# Altium PCB PCB1.PcbDoc
Units mil, origin at the board's own origin, x right, y up, seen from the top; angles counter-clockwise.
Board outline 3620 x 3695 mil, 2 copper layers (Top Layer, Bottom Layer); 45 components, 43 nets, 180 pads, 1 vias.
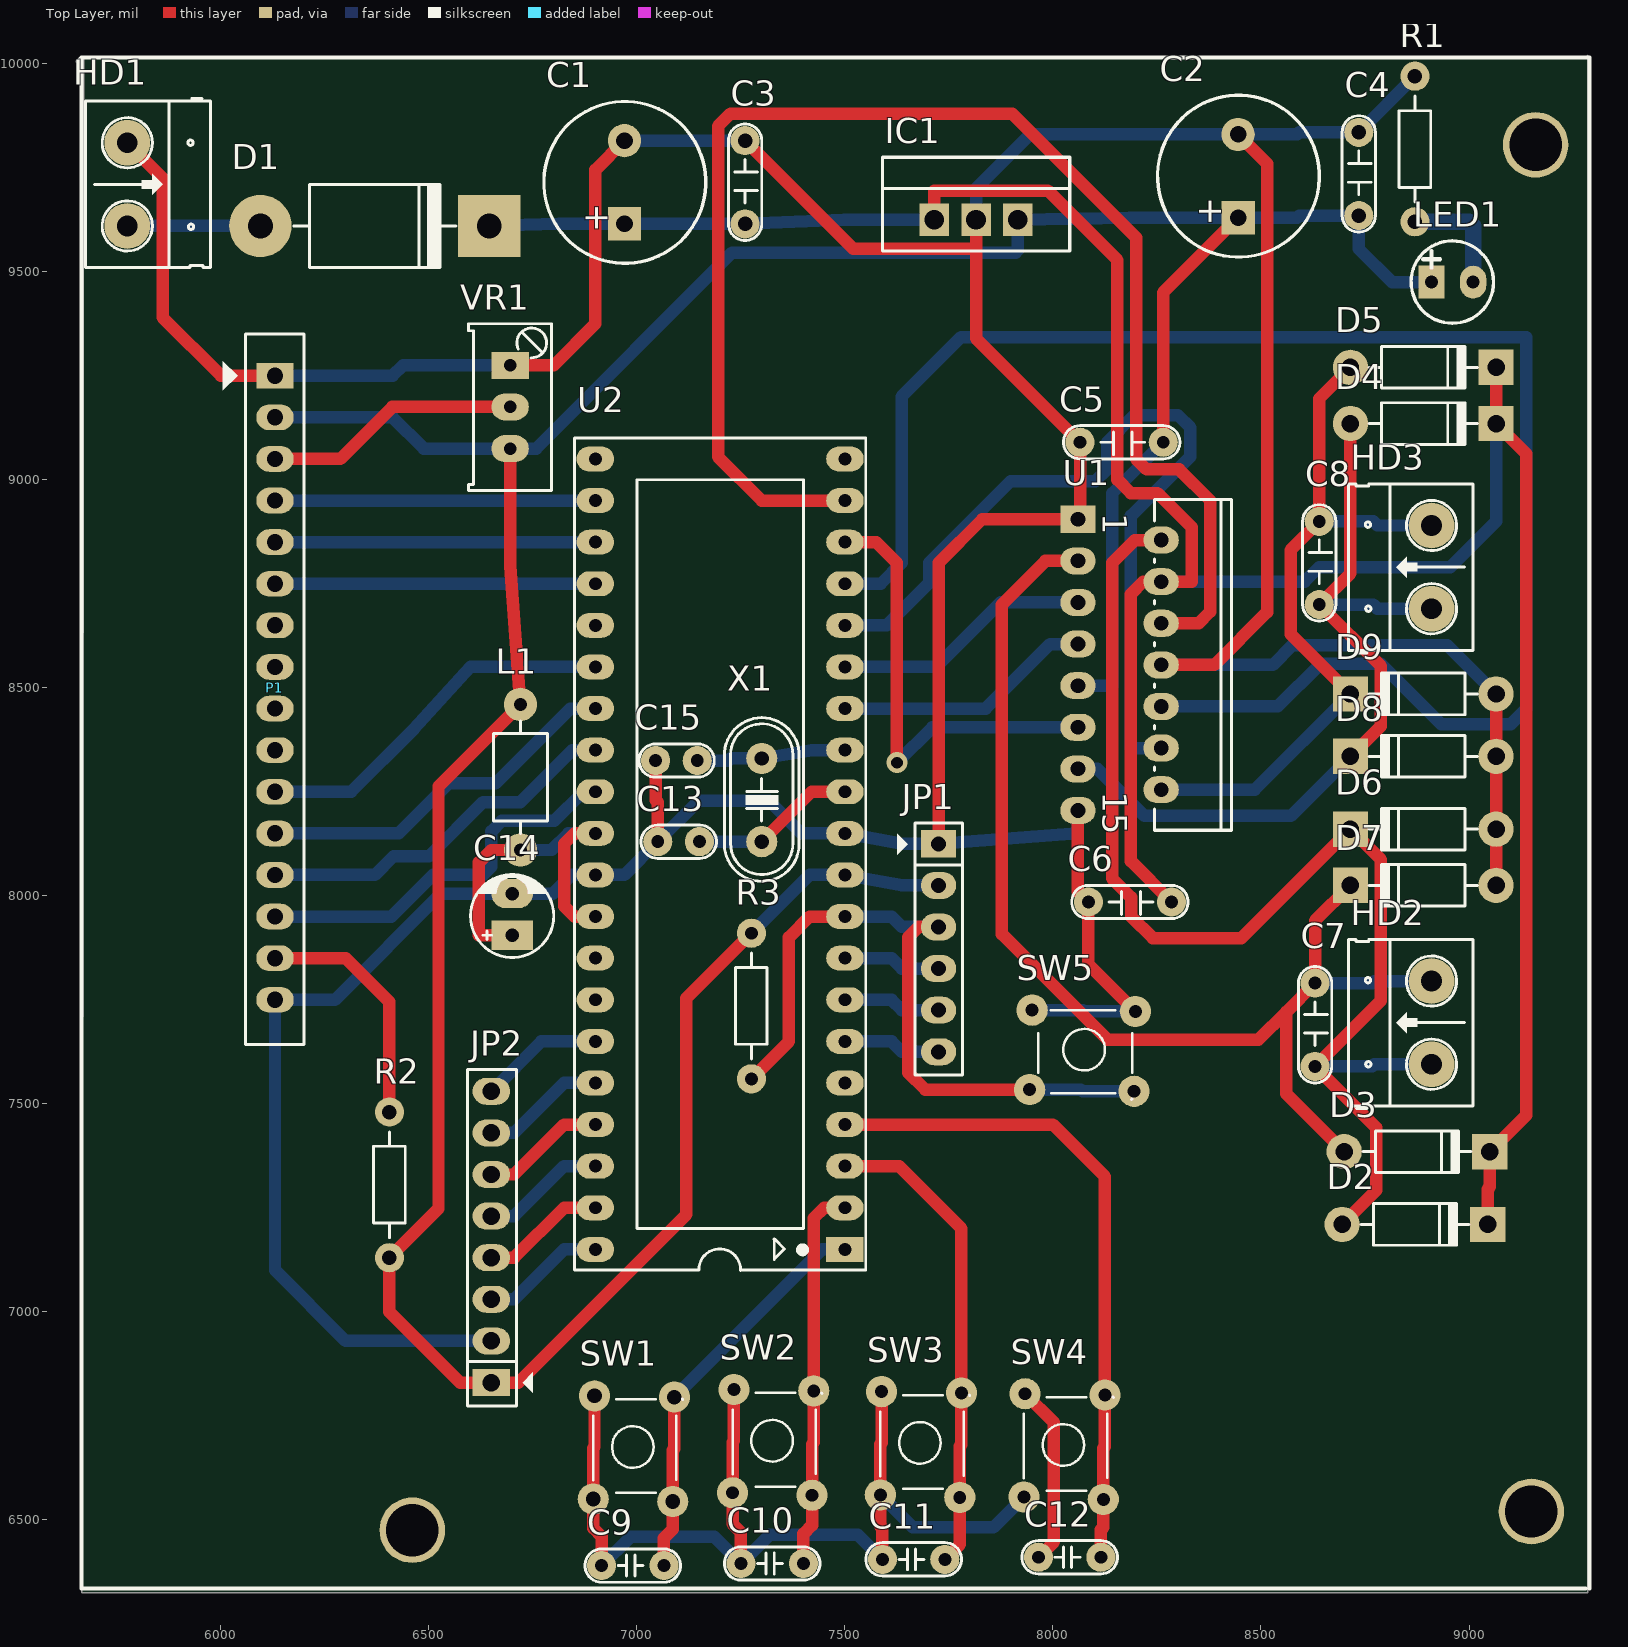
[diagram p0: Top Layer view]
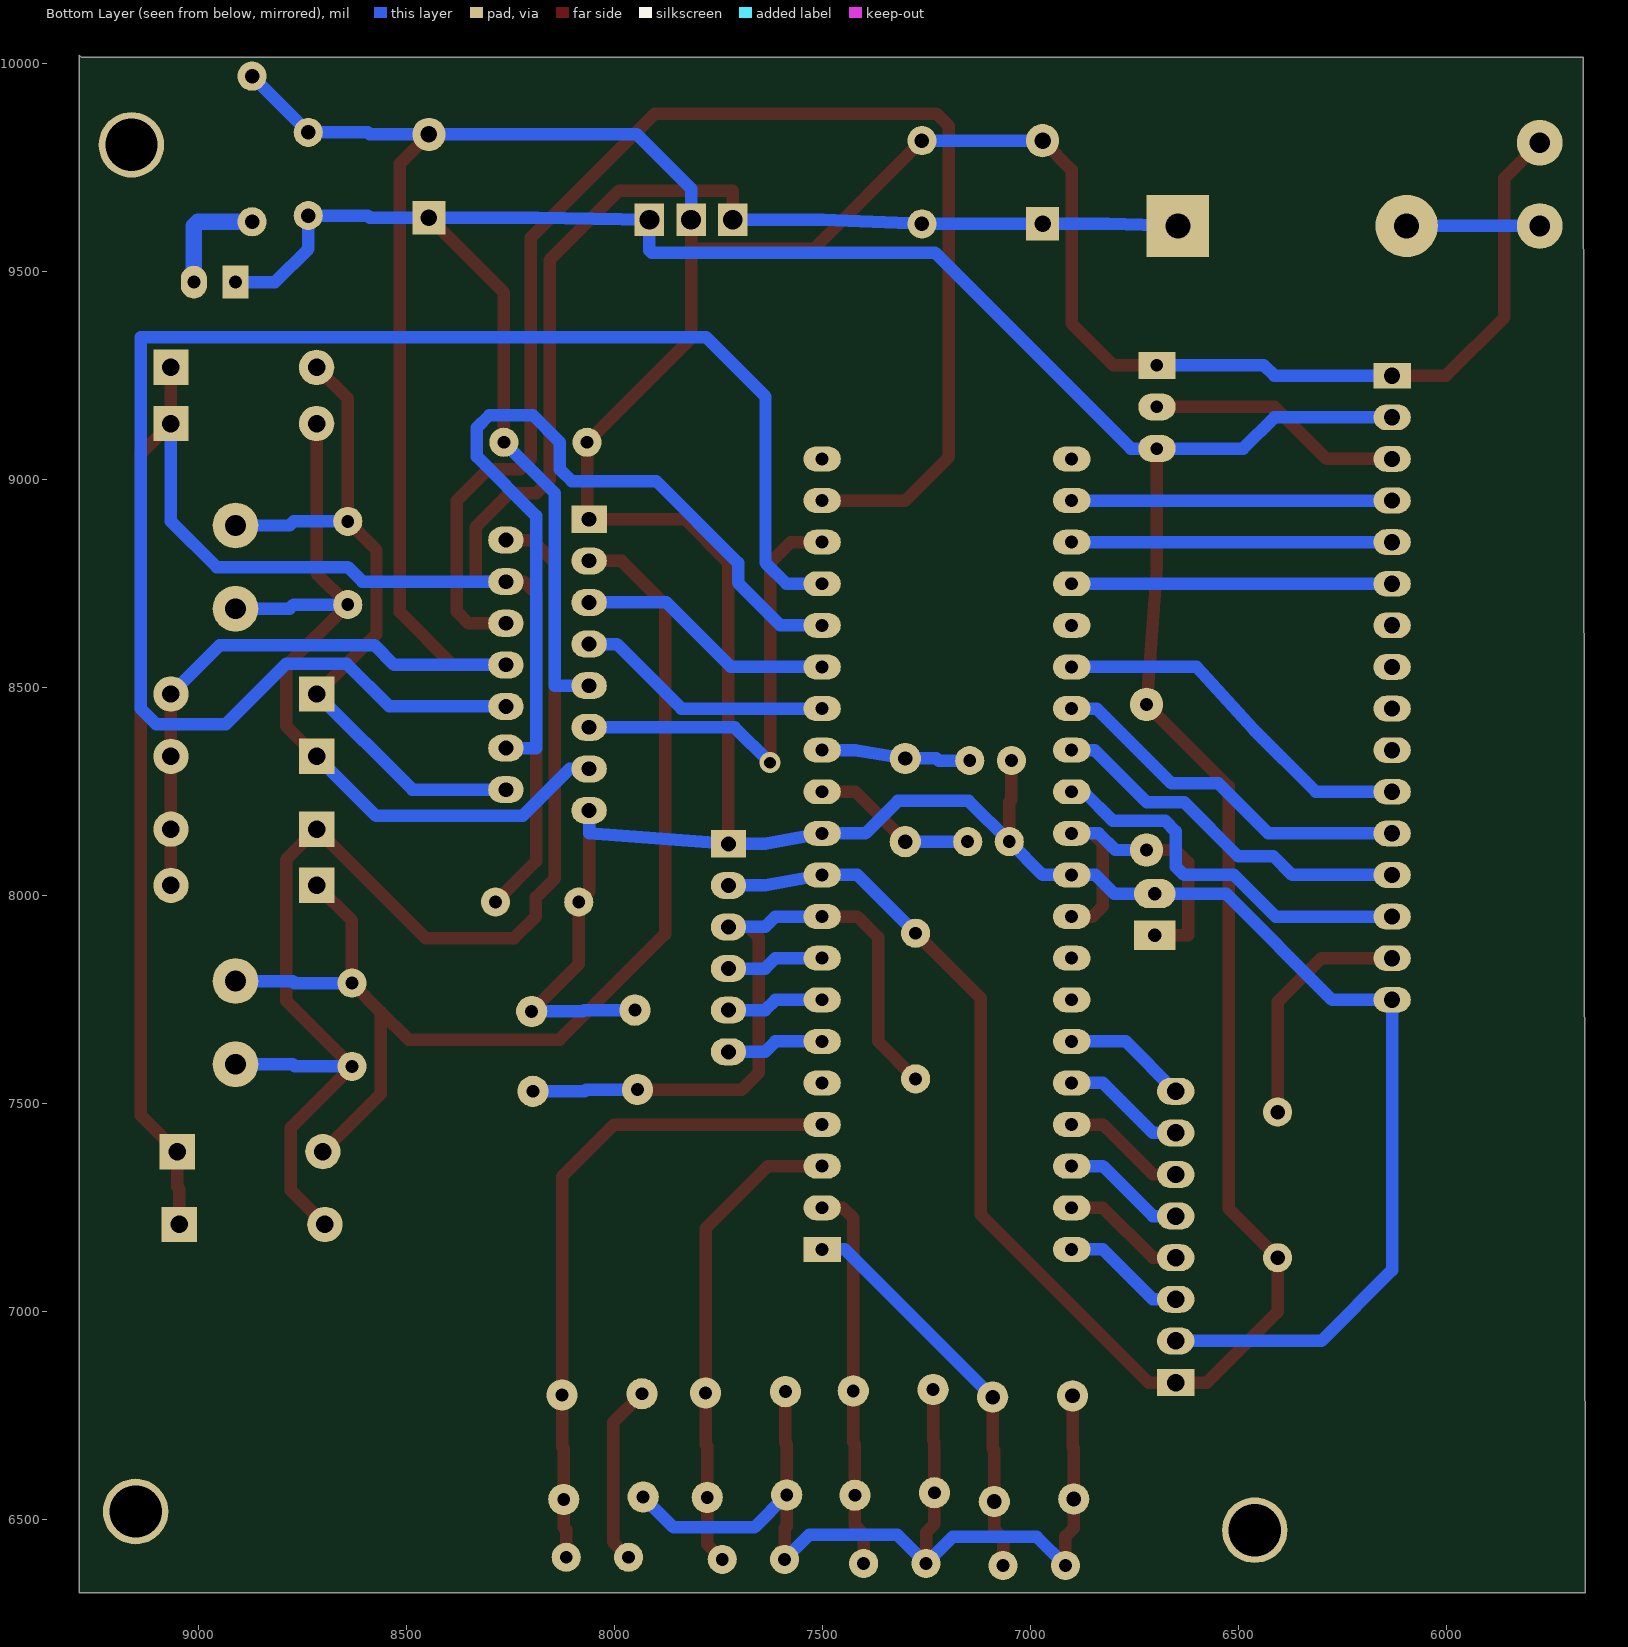
[diagram p1: Bottom Layer view, seen from below]
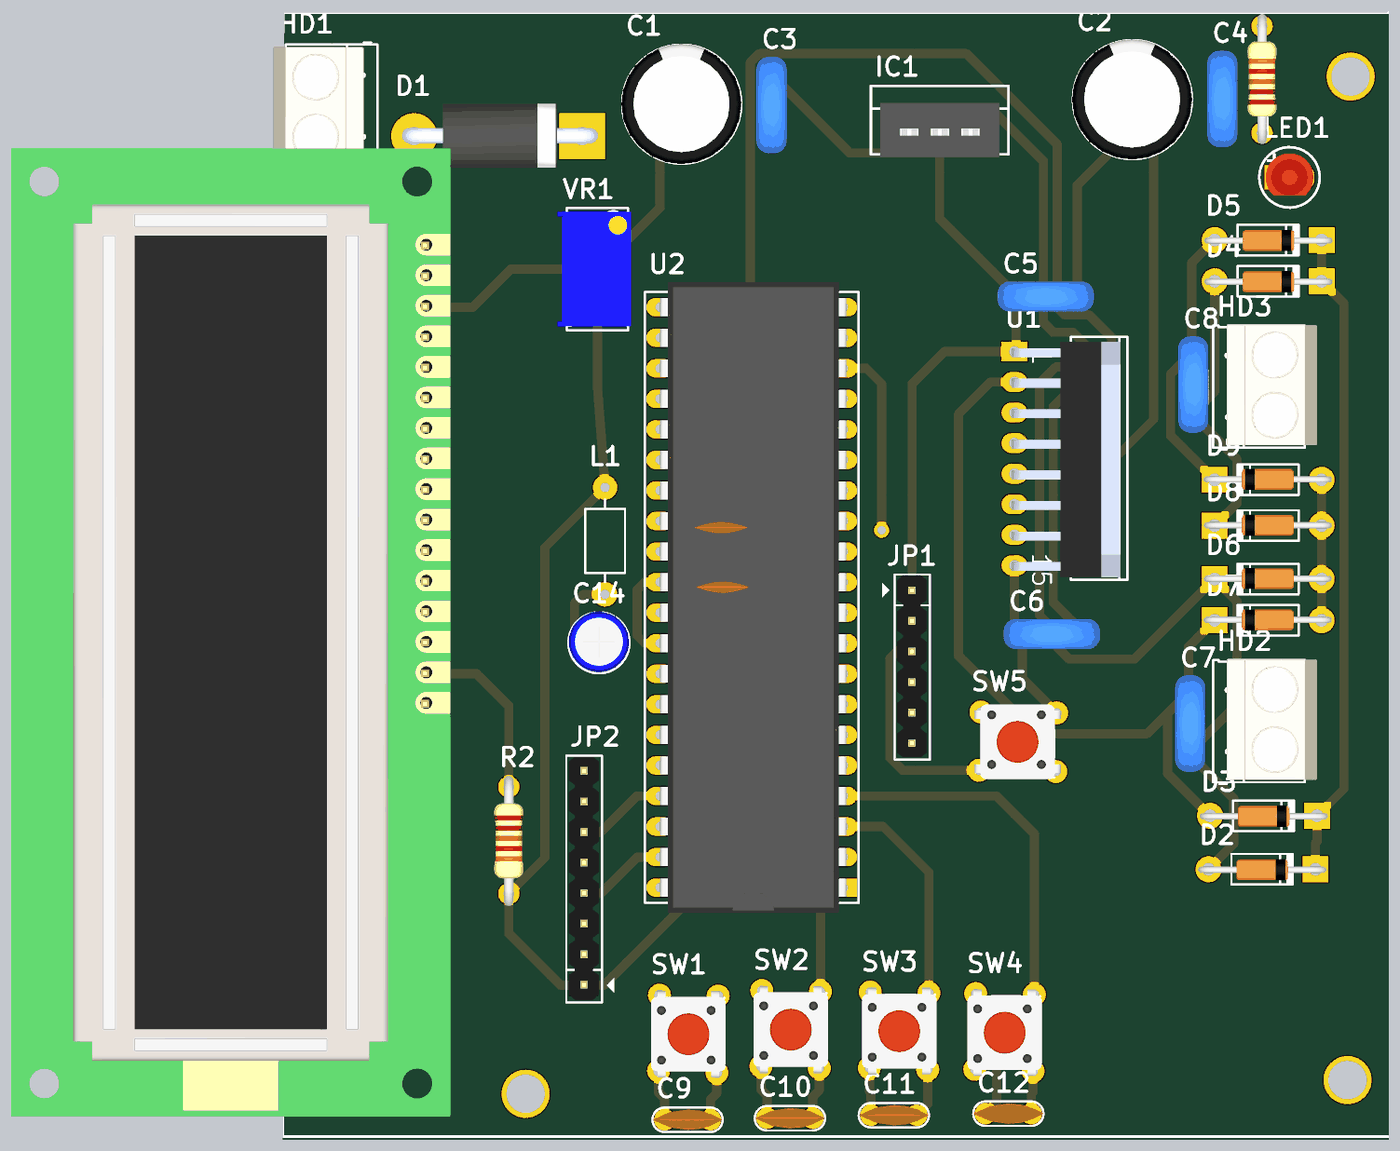
[diagram p2: 3D render of the assembled board from above, using the file's embedded part models]

## Layer stack, top to bottom
Top Layer: signal copper 1.4
Dielectric: dielectric 12.6, FR-4, Dk 4.8
Bottom Layer: signal copper 1.4

## Board outline
5670,10015 9280,10015 9285,10020 9285,6325 5665,6325

## Design rules (kind name [scope] priority, off if disabled: settings)
Clearance [All] p1: gap=15
PolygonConnect [All] p1: connectstyle=Relief reliefconductorwidth=10 reliefentries=4 polygonreliefangle="90 Angle"
RoutingCorners [All] p1: cornerstyle=45-Degree minsetback=0 maxsetback=0
RoutingVias [All] p1: holewidth=28 width=50 viastyle="Through Hole" minholewidth=28 minwidth=50 maxholewidth=28 maxwidth=50
SilkscreenOverComponentPads [All] p1: minsilkscreentomaskgap=10
SolderMaskExpansion [All] p1: expansion=4
Width [All] p1: maxlimit=40 minlimit=30 preferedwidth=30
26 further rules are at their usual default settings.

## Components (designator, comment, footprint, x,y, rotation, side; value= is the part's Value field where it differs from the comment)
C1 "Cap Pol 8mm" C10mm 6970,9715 r90 top locked
C2 "Cap Pol 8mm" C10mm 8445,9730 r90 top locked
C3 "104" CN2#1 7260,9815 r270 top
C4 "104" CN2#1 8735,9835 r270 top
C5 "104" CN2#2 8265,9090 r180 top
C6 "104" CN2#2 8285,7985 r180 top
C7 "104" CN2#2 8630,7790 r270 top
C8 "104" CN2#2 8640,8900 r270 top
C9 "104" CN1.5 6915,6390 r0 top
C10 "104" CN1.5 7250,6395 r0 top
C11 "104" CN1.5 7590,6405 r0 top
C12 "104" CN1.5 7965,6410 r0 top
C13 "22pF" CN1 7050,8130 r0 top
C14 "10uF" CP1/2 6700,7905 r90 top
C15 "22pF" CN1 7045,8325 r0 top
D1 "1N5408" D5A 6645,9610 r180 top
D2 "1N4007" D1A 8695,7210 r180 top
D3 "1N4007" D1A 8700,7385 r180 top
D4 "1N4007" D1A 8715,9135 r180 top
D5 "1N4007" D1A 8715,9270 r180 top
D6 "1N4007" D1A 9065,8160 r0 top
D7 "1N4007" D1A 9065,8025 r0 top
D8 "1N4007" D1A 9065,8335 r0 top
D9 "1N4007" D1A 9065,8485 r0 top
HD1 "Header 2" HED2 5775,9810 r270 top
HD2 "motor1" HED2 8910,7595 r90 top
HD3 "motor" HED2 8910,8690 r90 top
IC1 "LM7805" TO-220 7815,9625 r0 top
JP1 "JP6 PIN" JP6 7725,8125 r270 top
JP2 "JP8 PIN" JP8 6650,6830 r90 top
L1 "150mH" L/0.4 6720,8110 r90 top
LED1 "LED3" LED3mm 8960,9475 r0 top
P1 "LCD16x2" LCD16X2N 6130,9250 r270 top
R1 "1k" R1/4W#1 8870,9970 r270 top
R2 "220R" R1/4W#1 6405,7130 r90 top
R3 "10k" R1/4W#2 7275,7560 r90 top
SW1 "SW" SW4#1 6895,6550 r90 top
SW2 "SW" SW4#2 7230,6565 r90 top
SW3 "SW" SW4#2 7585,6560 r90 top
SW4 "SW" SW4#2 7930,6555 r90 top
SW5 "SW" SW4#2 7950,7725 r0 top
U1 "L298N" DIP15SL2 8160,8555 r270 top
U2 "ATmega16-16PI" DIP40/W0.6 7500,7150 r90 top
VR1 "10K" VR1 6695,9275 r270 top
X1 "4Mhz" XT2 7300,8230 r270 top

## Footprints (in the part's own frame and the unit in brackets; to place one, negate y for a bottom-side part, rotate by r counter-clockwise, add the part's x,y. Pads: shape width x height; smd on the part's side, far side on the other; paste and mask are expansions set on the pad)
C10mm [mil]
  rect 80x80 hole 40: 1(-100,0)
  round 80 hole 40: 2(100,0)
  silkscreen extent -195,-195 194,194, body extent -197,-197 196,197, height 788
CN1 [mil]
  round 70 hole 31: 1(0,0) 2(100,0)
  silkscreen extent -40,-40 141,40, body extent -60,-30 170,37, height 265
CN1.5 [mil]
  round 70 hole 31: 1(0,0) 2(150,0)
  silkscreen extent -40,-40 190,40, body extent -40,-33 190,33, height 235
CN2#1 [mil]
  round 70 hole 35: 1(0,0) 2(200,0)
  silkscreen extent -40,-40 240,40, body extent -54,-44 260,55, height 407
CN2#2 [mil]
  round 70 hole 31: 1(0,0) 2(200,0)
  silkscreen extent -40,-40 240,40, body extent -54,-44 260,55, height 407
CP1/2 [mil] "Tu hoa < 22uF/16>50V"
  rect 70x100 hole 32: 1(0,0)
  oval 70x100 hole 32: 2(100,0)
  silkscreen extent -53,-100 146,100, body extent -49,-99 149,99, height 287
D1A [mil] "Diode 1A, W 100mil, L 350mil"
  round 85 hole 42: 1(0,0)
  rect 85x85 hole 42: 2(-350,0)
  silkscreen extent -305,-50 -45,50, body extent -386,-33 34,36, height 84
D5A [mil] "Diode 5A, W 200mil, L 550mil"
  round 150 hole 60: 1(550,0)
  rect 150x150 hole 60: 2(0,0)
  silkscreen extent 80,-100 470,100, body extent -52,-106 590,103, height 254
DIP15SL2 [mil] "TO, Thru-Hole, Vertical, Heatsink Mounted; 15 Bent Staggered Leads; Pitch 1.27 mm"
  rect 65x85 hole 35.43: 1(-350,-100)
  oval 65x85 hole 35.43: 2(-300,100) 3(-250,-100) 4(-200,100) 5(-150,-100) 6(-100,100) 7(-50,-100) 8(0,100) 9(50,-100) 10(100,100) 11(150,-100) 12(200,100) 13(250,-100) 14(300,100) 15(350,-100)
  silkscreen extent -398,84 398,269, body extent -382,-110 390,247, height 895
DIP40/W0.6 [mil] "40 PIN, W 600mil, Pin to pin 100mil"
  rect 60x90 hole 31: 1(0,0)
  oval 60x90 hole 31: 2(100,0) 3(200,0) 4(300,0) 5(400,0) 6(500,0) 7(600,0) 8(700,0) 9(800,0) 10(900,0) 11(1000,0) 12(1100,0) 13(1200,0) 14(1300,0) 15(1400,0) 16(1500,0) 17(1600,0) 18(1700,0) 19(1800,0) 20(1900,0) 21(1900,600) 22(1800,600) 23(1700,600) 24(1600,600) 25(1500,600) 26(1400,600) 27(1300,600) 28(1200,600) 29(1100,600) 30(1000,600) 31(900,600) 32(800,600) 33(700,600) 34(600,600) 35(500,600) 36(400,600) 37(300,600) 38(200,600) 39(100,600) 40(0,600)
  silkscreen extent -50,-50 1950,650, body extent -82,-10 1982,600, height 224
HED2 [mil] "Header 2, 2 pin, hight 300mil, Pin to Pin 200, Colour Green"
  round 110 hole 50: 1(0,0) 2(200,0)
  silkscreen extent -106,-100 300,200, body extent -92,-140 302,155, height 394
JP6 [mil] "JP6"
  rect 65x85 hole 36: 1(0,0)
  oval 65x85 hole 36: 2(100,0) 3(200,0) 4(300,0) 5(400,0) 6(500,0)
  silkscreen extent -50,-99 556,58, body extent -48,-50 548,48, height 323
JP8 [mil] "JP8"
  rect 65x90 hole 42: 1(0,0)
  oval 65x90 hole 42: 2(100,0) 3(200,0) 4(300,0) 5(400,0) 6(500,0) 7(600,0) 8(700,0)
  silkscreen extent -56,-100 752,57, body extent -48,-50 748,48, height 323
L/0.4 [mil] "Inductor , 2 Pin, L 350mil, W 150 mil"
  round 80 hole 31: 1(0,0) 2(350,0)
  silkscreen extent 40,-65 310,65
LCD16X2N [mil] "LCD dipslay 16x2, 16 pin"
  rect 62x90 hole 39: 1(0,0)
  oval 62x90 hole 39: 2(100,0) 3(200,0) 4(300,0) 5(400,0) 6(500,0) 7(600,0) 8(700,0) 9(800,0) 10(900,0) 11(1000,0) 12(1100,0) 13(1200,0) 14(1300,0) 15(1400,0) 16(1500,0)
  silkscreen extent -100,-125 1608,70, body extent -320,-1353 2850,84, height 764
LED3mm [mm]
  rect 1.6x2 hole 0.8: 1(-1.27,0)
  oval 1.6x2 hole 0.8: 2(1.27,0)
  silkscreen extent -2.52,-2.51 2.51,2.52, body extent -1.99,-1.5 1.99,1.99, height 5.38
R1/4W#1 [mil] "R 1/4W, 2 Pin, 350mil"
  round 70 hole 35: 1(0,0) 2(350,0)
  silkscreen extent 48,-38 302,38, body extent -40,-47 386,47, height 111
R1/4W#2 [mil] "R 1/4W, 2 Pin, 350mil"
  round 70 hole 31: 1(0,0) 2(350,0)
  silkscreen extent 48,-38 302,38, body extent -40,-47 386,47, height 111
SW4#1 [mil] "SW button 4pin, 250 x250 mil"
  round 75 hole 35: 1(0,0) 2(245,-195) 3(248,-3) 4(-6,-191)
  silkscreen extent 15,-215 240,0, body extent -36,-220 276,24, height 276
SW4#2 [mil] "SW button 4pin, 250 x250 mil"
  round 75 hole 31: 1(0,0) 2(245,-195) 3(248,-3) 4(-6,-191)
  silkscreen extent 15,-215 240,0, body extent -36,-220 276,24, height 276
TO-220 [mm]
  rect 1.8x2 hole 1.2: 1(-2.54,0) 2(0,0) 3(2.54,0)
  silkscreen extent -5.71,-1.91 5.71,3.81, body extent -4.92,-2.13 4.98,2.37, height 8.08
VR1 [mil] "Variable Resistor"
  rect 65x90 hole 30: 1(0,0)
  oval 65x90 hole 30: 2(100,0) 3(200,0)
  silkscreen extent -100,-100 301,100, body extent -88,-130 288,110, height 455
XT2 [mil] "Footpin for Crystal 2 pin"
  round 75 hole 34: 1(-100,0) 2(100,0)
  silkscreen extent -198,-90 195,90, body extent -233,-93 213,90, height 138

## Part data
C1 C2: "Polarized Capacitor (Axial)"
C3 C4 C5 C6 C7 C8: library part CN2, "Cap np 104 => 105pF"
C9 C10 C11 C12: library part CN1.5, "Cap np 682pF => 104pF"
C13 C15: library part CN1, "Cap np  1pF - 472pF"
C14: library part CP1, "Cap P  0,1uF < 22uF , 16 - 50V"
D1: library part D5A, "Diode 5A"
D2 D3 D4 D5 D6 D7 D8 D9: library part D1A, "Diode 1A"
HD1 HD2 HD3: library part Hed2, "Header 2 (Green)"
IC1: library part LM78xx, "On ap +, from + 5 to + 24VDC"
JP1: library part JP6
JP2: library part JP8
L1: library part L1, "Inductor"
LED1: library part "LED 3mm", "LED 3mm"
P1: library part "LCD Text"
R1 R2 R3: library part R1/4W, "Resistor 1/4W"
SW1 SW2 SW3 SW4 SW5: library part SW4, "Switch button 4 pin"
U1: "Dual Full Bridge Driver"
U2: "8-Bit AVR Microcontroller with 16K Bytes of In-System Programmable Flash Memory"
VR1: library part VR1, "Var Resistor"
X1: library part XT2, "Crystal For all Crystal 2pin."

## Free pads (board coordinates)
  round 157.48 hole 125.98: 0(6460,6475) 1(9150,6520) 2(9160,9805)

## Via types
v1: diameter 50, hole 28, Top Layer to Bottom Layer, 1 vias

## Nets (pads, with @x,y where several pads share a name; then routed paths per layer and width w, separated by ;. In a path a pad name is that pad's centre, name@x,y a point inside that pad or via, vN(x,y) a via of type N, cw(c..) or ccw(c..) an arc to the next point about the centre after c; other vN are vias at no path point)
12V: C1.1 C3.2 C6.1 D1.2 D2.2 D3.2 D4.2 D5.2 IC1.1 U1.4 | length 6701.5
  Top Layer w30: IC1.1 7715,9695 7988,9695 8155,9528 8155,9000 8186.92,8968.08 8250.92,8968.08 8333,8886 8333,8755 U1.4 8217,8755 8187,8725 8187,8083 C6.1 ; D2.2 9045,7295 9050,7300 D3.2 9138,7473 9138,9062 D4.2 D5.2
  Bottom Layer w30: D1.2 6813,9615 C1.1 C3.2 7498,9625 IC1.1 ; U1.4 8605,8755 8640,8790 8955,8790 9065,8900 D4.2
DIR1P: U1.7 U2.14 | length 624.2
  Bottom Layer w30: U2.14 7838,8450 7993,8605 U1.7
DIR1T: U1.5 U2.15 | length 624.2
  Bottom Layer w30: U2.15 7719,8550 7874,8705 U1.5
DIR2P: U1.12 U2.16 | length 2019.3
  Bottom Layer w30: U2.16 7600,8650 7702,8752 7702,8800 7898.33,8996.33 8101.33,8996.33 8130,9025 8130,9090 8195,9155 8300,9155 8330,9125 8330,9055.5 8187.5,8913 8187.5,8355 U1.12
DIR2T: U1.10 U2.17 | length 4007.4
  Bottom Layer w30: U2.17 7586,8750 7636,8800 7636,9200 7779,9343 9138,9343 9138,8450 9100,8412 8933.5,8412 8788,8557.5 8642.5,8557.5 8540,8455 U1.10
GND: C1.2 C2.2 C3.1 C4.1 C5.2 C6.2 C13.1 C14.2 C15.1 D6.1 D7.1 D8.1 D9.1 HD1.1 IC1.2 JP1.1 JP2.2 P1.1 P1.16 R1.1 SW5.1 SW5.3 U1.1 U1.8 U1.15 U2.11 U2.31 VR1.1 | length 13413.9
  Top Layer w30: HD1.1 5860,9725 5860,9390 6000,9250 P1.1 ; VR1.1 6800,9275 6900,9375 6900,9745 C1.2 ; C15.1 7045,8230 7050,8225 C13.1 ; C3.1 7520,9555 7815,9555 ; JP1.1 7725,8800 7830,8905 U1.1 8065,8905 C5.2 7815,9340 7815,9555 ; IC1.2 7815,9555 ; U1.15 8060,8010 C6.2 8085,7835 SW5.3 ; U1.8 8388,8555 8515,8682 8515,9760 C2.2 ; D7.1 D6.1 D8.1 D9.1
  Bottom Layer w30: P1.1 6413,9250 6438,9275 VR1.1 ; JP2.2 6300,6930 6130,7100 P1.16 6274,7750 6529,8005 C14.2 6798,8005 6843,8050 U2.31 6970,8050 C13.1 7148,8228 7318,8228 7396,8150 U2.11 7637,8125 JP1.1 8060,8150 U1.15 ; C1.2 C3.1 ; IC1.2 7815,9700 7945,9830 C2.2 8587,9830 8592,9835 C4.1 R1.1 ; SW5.1 8072,7725 8075,7722 SW5.3 ; U1.8 8528.5,8555 8576,8602.5 8947.5,8602.5 D9.1
MISO: JP1.5 U2.7 | length 235.4
  Bottom Layer w30: U2.7 7612,7750 7637,7725 JP1.5
MOSI: JP1.6 U2.6 | length 235.4
  Bottom Layer w30: U2.6 7612,7650 7637,7625 JP1.6
NetC7_1: C7.1 D3.1 D7.2 HD2.2 U1.3 | length 2878.9
  Top Layer w30: U1.3 7982,8805 7877,8700 7877,7908 8131,7654 8494,7654 8561,7721 ; D3.1 8561,7524 8561,7721 ; D7.2 8630,7940 C7.1 8561,7721
  Bottom Layer w30: C7.1 8767,7790 8772,7795 HD2.2
NetC7_2: C7.2 D2.1 D6.2 HD2.1 U1.2 | length 3089.5
  Top Layer w30: U1.2 8197,8855 8142,8800 8142,8042 8188,7996 8188,7950 8240,7898 8453,7898 D6.2 8788,8087 8788,7748 C7.2 8777,7443 8777,7292 D2.1
  Bottom Layer w30: C7.2 8767,7590 8772,7595 HD2.1
NetC8_1: C8.1 D5.1 D9.2 HD3.2 U1.14 | length 1728.7
  Top Layer w30: D9.2 8571,8629 8571,8831 C8.1 8640,9195 D5.1
  Bottom Layer w30: U1.14 8485,8255 D9.2 ; C8.1 8770,8900 8780,8890 HD3.2
NetC8_2: C8.2 D4.1 D8.2 HD3.1 U1.13 | length 1957.8
  Top Layer w30: D8.2 8788,8408 8788,8552 C8.2 8715,8775 D4.1
  Bottom Layer w30: U1.13 8107,8305 8220,8192 8572,8192 D8.2 ; C8.2 8770,8700 8780,8690 HD3.1
NetC9_1: C9.1 C10.1 C11.1 SW1.1 SW1.3 SW2.1 SW2.3 SW3.1 SW3.3 SW4.1 | length 2442
  Top Layer w30: SW1.3 6898,6675 6895,6672 SW1.1 6895,6480 6915,6460 C9.1 ; SW2.3 7233,6690 7230,6687 SW2.1 7230,6490 7250,6470 C10.1 ; SW3.3 7588,6685 7585,6682 SW3.1 7585,6485 7590,6480 C11.1
  Bottom Layer w30: C9.1 6984,6459 7186,6459 C10.1 7319,6464 7531,6464 C11.1 ; SW3.1 7663,6482 7857,6482 SW4.1
NetC9_2: C9.2 SW1.2 SW1.4 U2.1 | length 972.4
  Top Layer w30: C9.2 7065,6456 7086,6477 SW1.4 7086,6667 7090,6671 SW1.2
  Bottom Layer w30: SW1.2 7445,7150 U2.1
NetC10_2: C10.2 SW2.2 SW2.4 U2.2 | length 925.7
  Top Layer w30: C10.2 7400,6466 7421,6487 SW2.4 7421,6682 7425,6686 SW2.2 7425,7225 7450,7250 U2.2
NetC11_2: C11.2 SW3.2 SW3.4 U2.3 | length 1153.7
  Top Layer w30: U2.3 7630,7350 7780,7200 SW3.2 7780,6681 7776,6677 SW3.4 7776,6441 C11.2
NetC12_1: C12.1 SW4.3 | length 436.9
  Top Layer w30: SW4.3 8002,6734 8002,6447 C12.1
NetC12_2: C12.2 SW4.2 SW4.4 U2.4 | length 1595.9
  Top Layer w30: U2.4 8000,7450 8125,7325 SW4.2 8125,6676 8121,6672 SW4.4 8121,6482 8115,6476 C12.2
NetC13_2: C13.2 U2.12 X1.2 | length 399.7
  Top Layer w30: X1.2 7420,8250 U2.12
  Bottom Layer w30: C13.2 X1.2
NetC14_1: C14.1 L1.1 U2.30 U2.32 | length 884.7
  Top Layer w30: C14.1 6620,7905 6620,8080 6650,8110 L1.1 ; U2.32 6850,7950 6825,7975 6825,8125 6850,8150 U2.30
  Bottom Layer w30: L1.1 6795,8110 6835,8150 U2.30
NetC15_2: C15.2 U2.13 X1.1 | length 358.7
  Bottom Layer w30: C15.2 7220,8325 7225,8330 X1.1 7420,8350 U2.13
NetD1_1: D1.1 HD1.2 | length 320
  Bottom Layer w30: HD1.2 D1.1
NetJP2_3: JP2.3 U2.40 | length 299.7
  Bottom Layer w30: JP2.3 6705,7030 6825,7150 U2.40
NetJP2_4: JP2.4 U2.39 | length 299.7
  Top Layer w30: JP2.4 6705,7130 6825,7250 U2.39
NetJP2_5: JP2.5 U2.38 | length 299.7
  Bottom Layer w30: JP2.5 6705,7230 6825,7350 U2.38
NetJP2_6: JP2.6 U2.37 | length 299.7
  Top Layer w30: JP2.6 6705,7330 6825,7450 U2.37
NetJP2_7: JP2.7 U2.36 | length 299.7
  Bottom Layer w30: JP2.7 6705,7430 6825,7550 U2.36
NetJP2_8: JP2.8 U2.35 | length 299.7
  Bottom Layer w30: JP2.8 6770,7650 U2.35
NetLED1_2: LED1.2 R1.2 | length 279.1
  Bottom Layer w40: R1.2 9000,9620 9010,9610 LED1.2
NetP1_3: P1.3 VR1.2 | length 616.8
  Top Layer w30: P1.3 6287,9050 6412,9175 VR1.2
NetP1_4: P1.4 U2.22 | length 770
  Bottom Layer w30: P1.4 U2.22
NetP1_5: P1.5 U2.23 | length 770
  Bottom Layer w30: P1.5 U2.23
NetP1_6: P1.6 U2.24 | length 770
  Bottom Layer w30: P1.6 U2.24
NetP1_11: P1.11 U2.26 | length 898.3
  Bottom Layer w30: P1.11 6313,8250 6463,8400 6600,8550 U2.26
NetP1_12: P1.12 U2.27 | length 894.3
  Bottom Layer w30: P1.12 6427.12,8150 6547.12,8270 6660,8270 6840,8450 U2.27
NetP1_13: P1.13 U2.28 | length 894.3
  Bottom Layer w30: P1.13 6370,8050 6415,8095 6500,8095 6630,8225 6720,8225 6845,8350 U2.28
NetP1_14: P1.14 U2.29 | length 944.1
  Bottom Layer w30: P1.14 6410,7950 6510,8050 6630,8050 6650,8070 6650,8155 6675,8180 6801,8180 6871,8250 U2.29
NetP1_15: P1.15 R2.2 | length 583.5
  Top Layer w30: P1.15 6300,7850 6405,7745 R2.2
PWM1: U1.6 U2.19 | length 3432.4
  Top Layer w30: U2.19 7300,8950 7195,9055 7195,9850 7225,9880 7902,9880 8200,9582 8200,9050 8225,9025 8303,9025 8378,8950 8378,8683 8350,8655 U1.6
PWM2: U1.11 U2.18 | length 1095.9
  Top Layer w30: U2.18 7575,8850 7625,8800 v1(7625,8320)
  Bottom Layer w30: v1(7625,8320) 7710,8405 U1.11
RESET: JP1.3 R3.1 SW5.2 SW5.4 U2.9 | length 1738.3
  Top Layer w30: R3.1 7365,7650 7365,7900 7415,7950 U2.9 ; JP1.3 7677,7925 7652,7900 7652,7575 7693,7534 SW5.4
  Bottom Layer w30: U2.9 7612,7950 7637,7925 JP1.3 ; SW5.4 8067,7534 8071,7530 SW5.2
SCK: JP1.4 U2.8 | length 235.4
  Bottom Layer w30: U2.8 7612,7850 7637,7825 JP1.4
VCC: C2.1 C4.2 C5.1 IC1.3 JP1.2 JP2.1 L1.2 LED1.1 P1.2 R2.1 R3.2 U1.9 U2.10 VR1.3 | length 8939.3
  Top Layer w30: VR1.3 6695,8792 L1.2 6523,8263 6523,7248 R2.1 6405,7000 6575,6830 JP2.1 6715,6830 7119,7234 7119,7754 R3.2 ; C5.1 8265,9450 C2.1
  Bottom Layer w30: P1.2 6413,9150 6488,9075 VR1.3 6758,9075 7229,9546 7910,9546 7915,9551 IC1.3 8185,9630 C2.1 8587,9630 8592,9635 C4.2 8735,9555 8815,9475 LED1.1 ; R3.2 7415,8050 U2.10 7637,8025 JP1.2 ; U1.9 8142.5,8505 8142.5,8967.5 C5.1
pads on no net: P1.7 P1.8 P1.9 P1.10 U2.5 U2.20 U2.21 U2.25 U2.33 U2.34

## Silkscreen, mask and mechanical layers (free items; w line width, h text height)
Top Overlay:
  lines w10: 5655,10005 5665,10015 ; 9280,6335 5665,6335 5665,10015 ; 9290,6335 9290,10015 5665,10015

## Text inside footprints (layer, text, board x,y; h text height)
C1: Top Overlay "+" at 6930,9595 h60 r90
C2: Top Overlay "+" at 8405,9610 h60 r90
U1: Top Overlay "15" at 8120,8250 h59.06 r270; Top Overlay "1" at 8120,8920 h59.06 r270